# Altium PCB 0_10V.PcbDoc
Units mm, origin at the board's own origin, x right, y up, seen from the top; angles counter-clockwise.
Board outline 47.5 x 45 mm, 2 copper layers (Top Layer, Bottom Layer); 49 components, 38 nets, 172 pads, 67 vias.
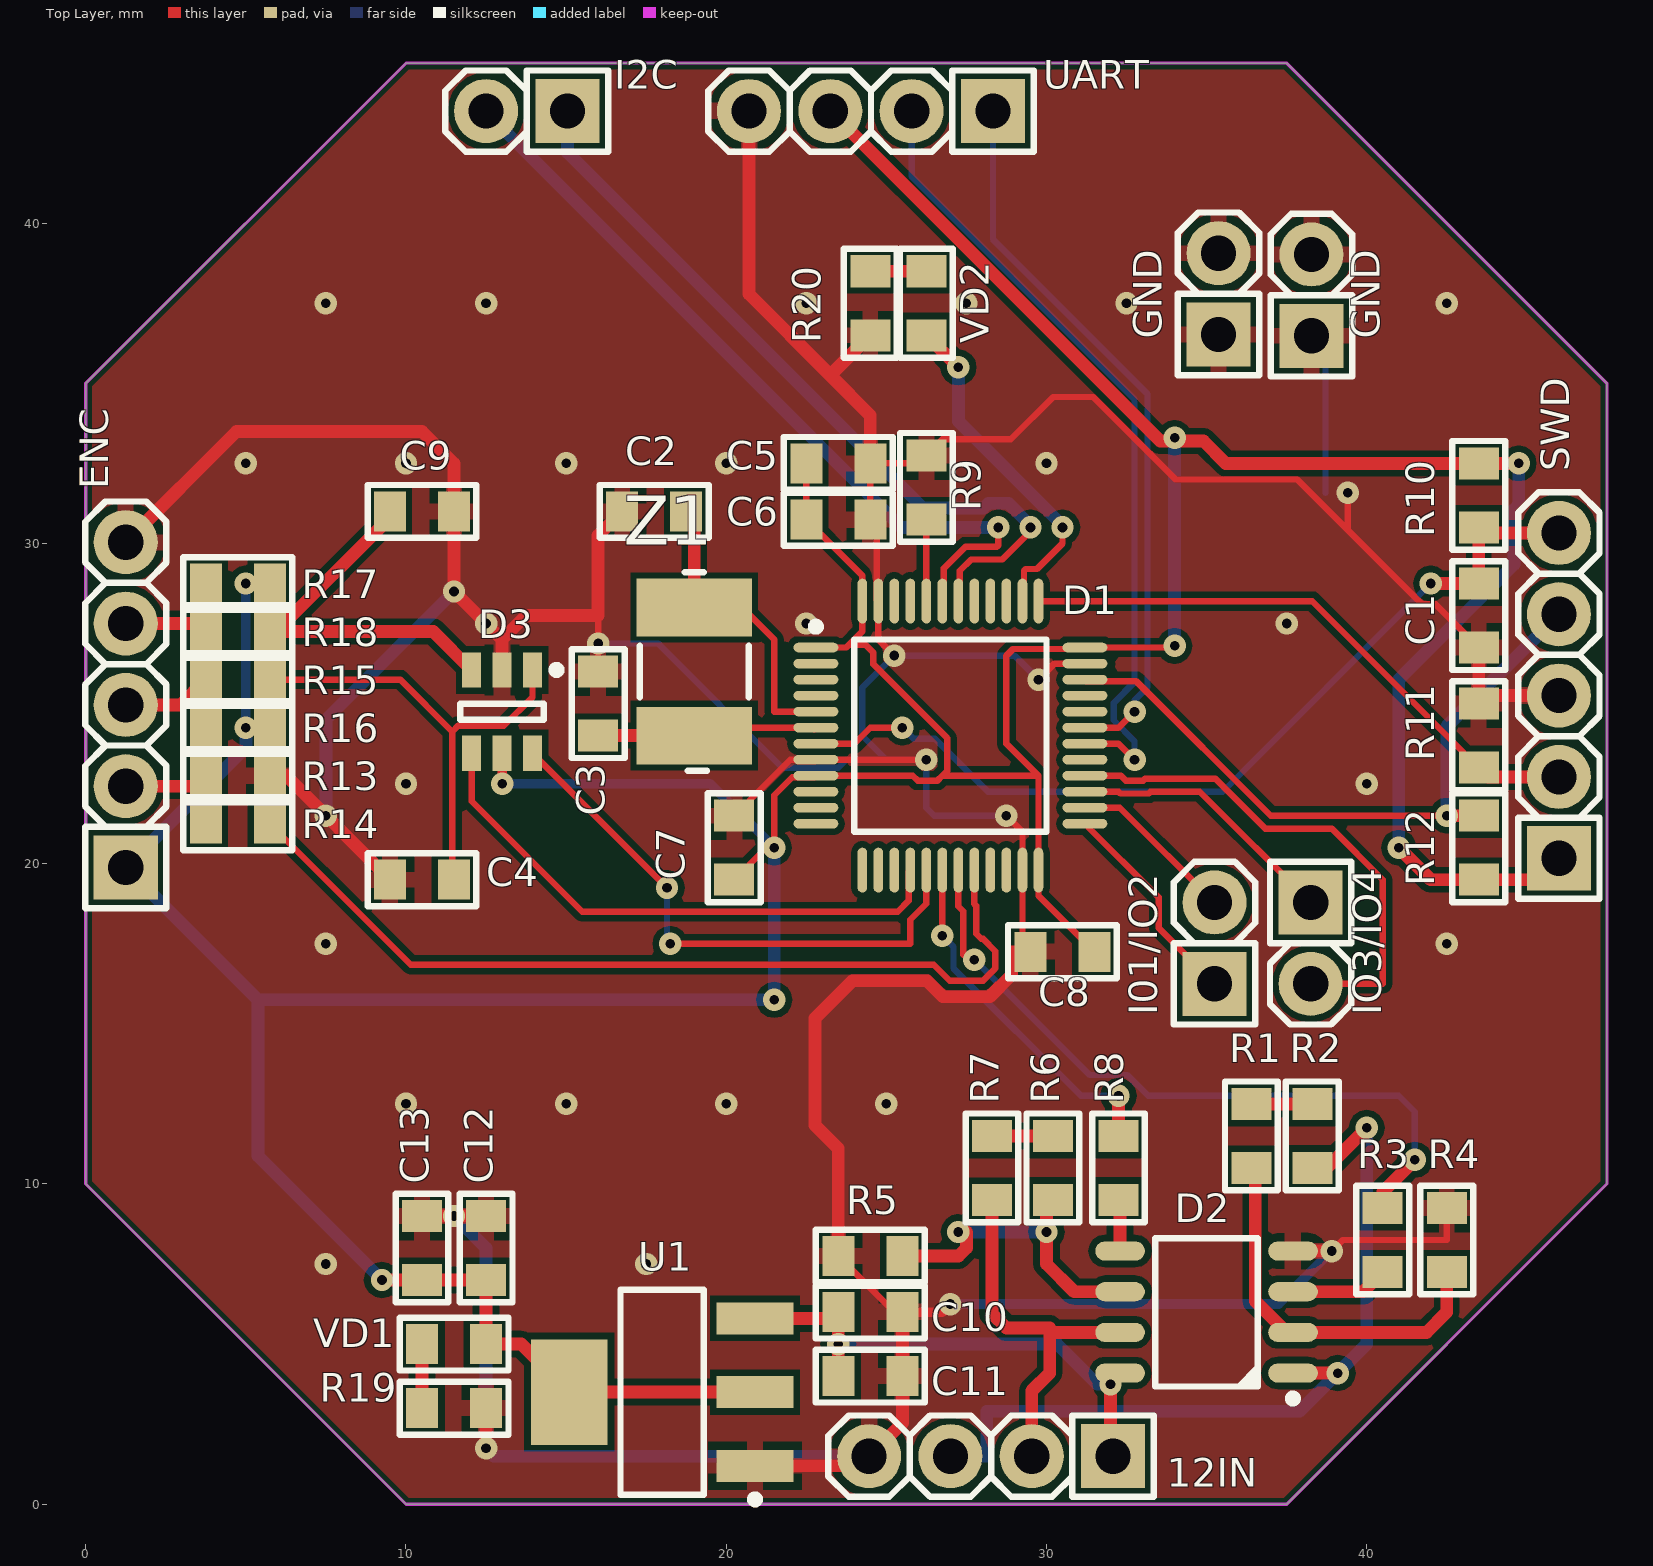
[diagram p0: Top Layer view]
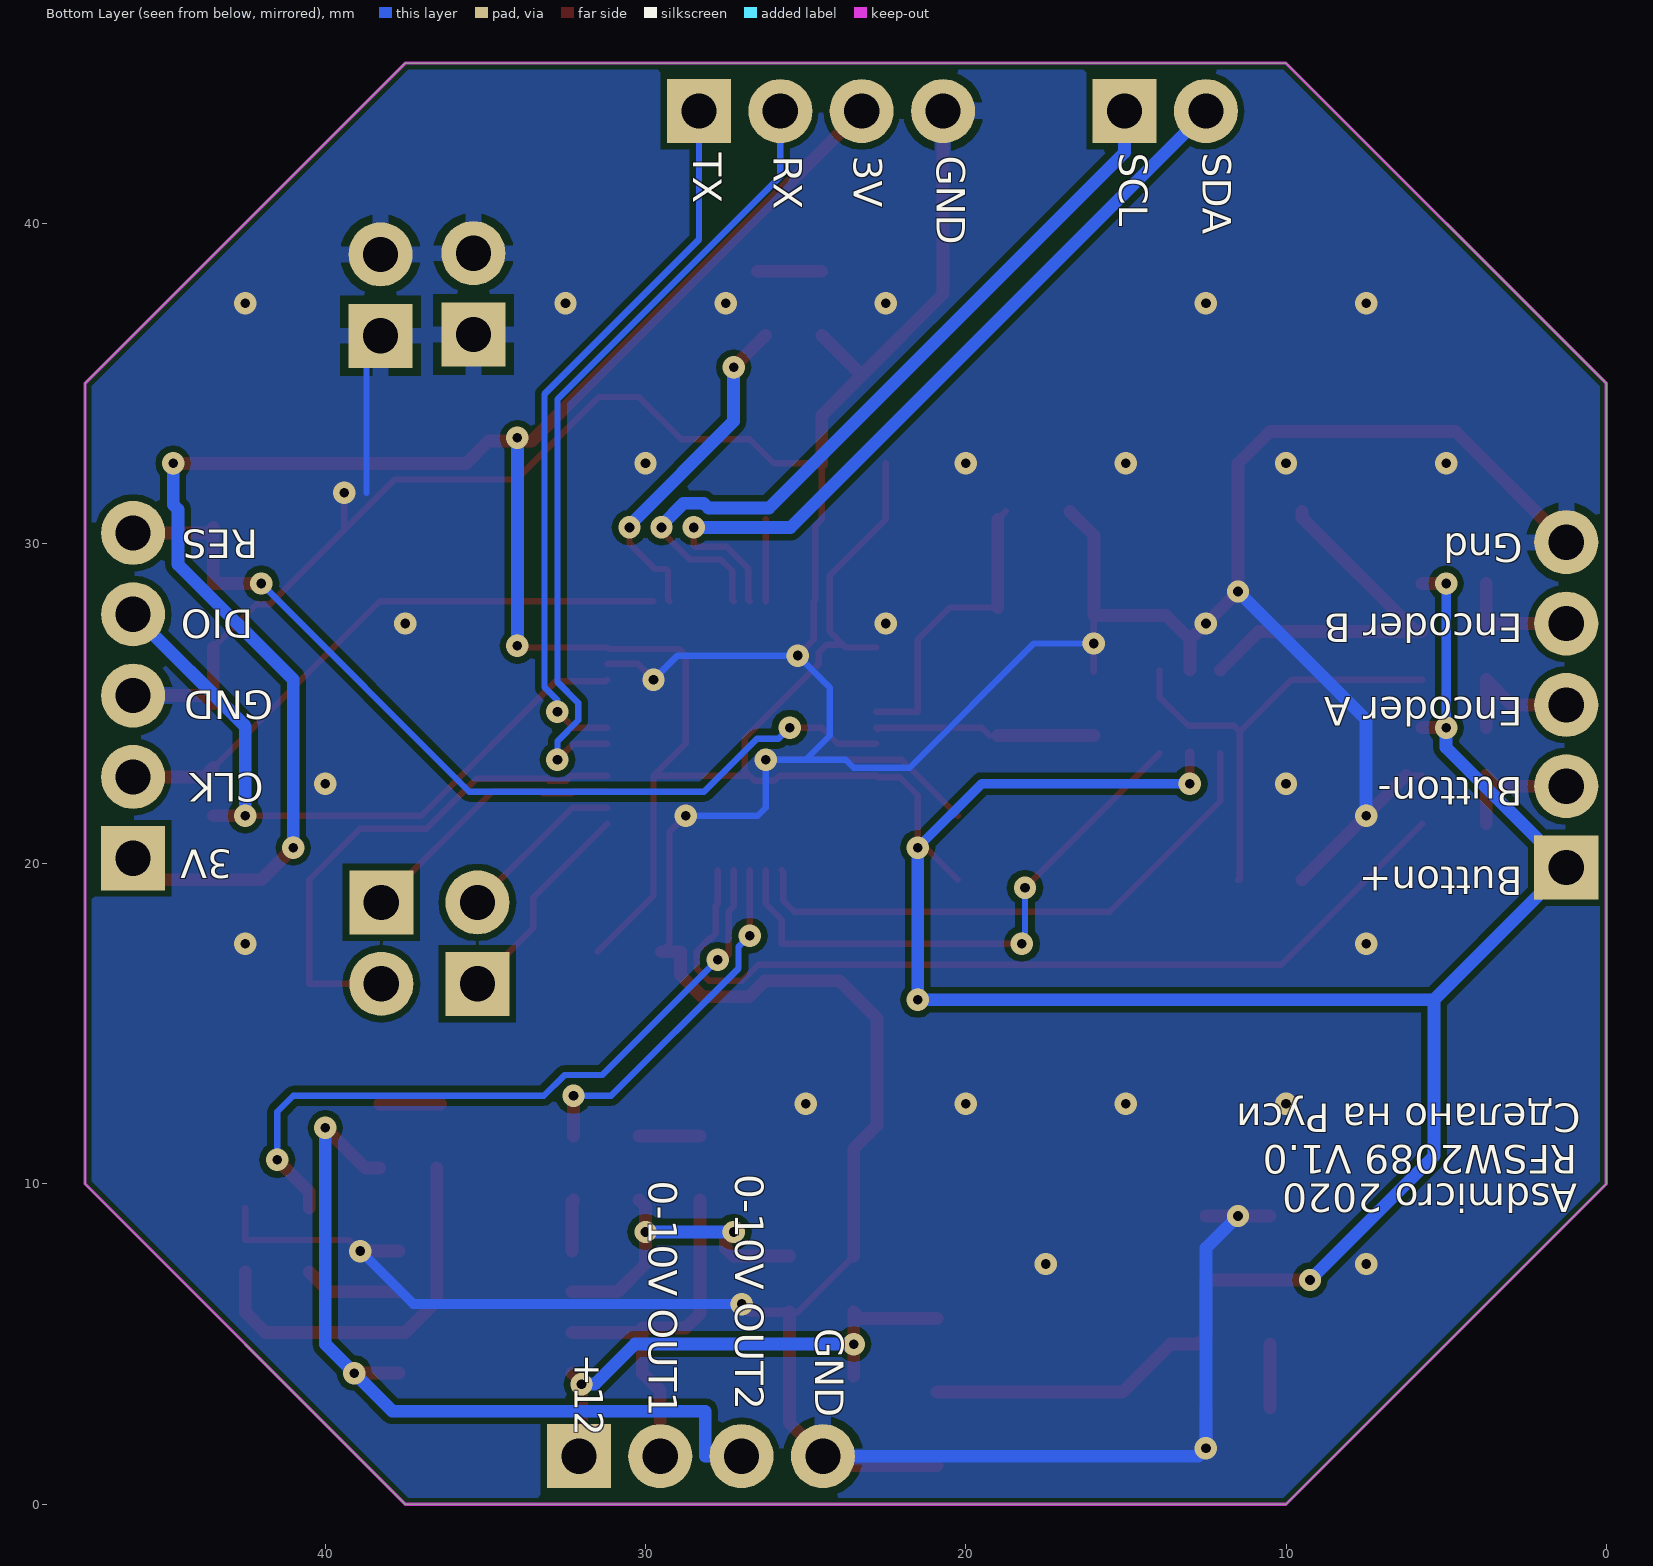
[diagram p1: Bottom Layer view, seen from below]
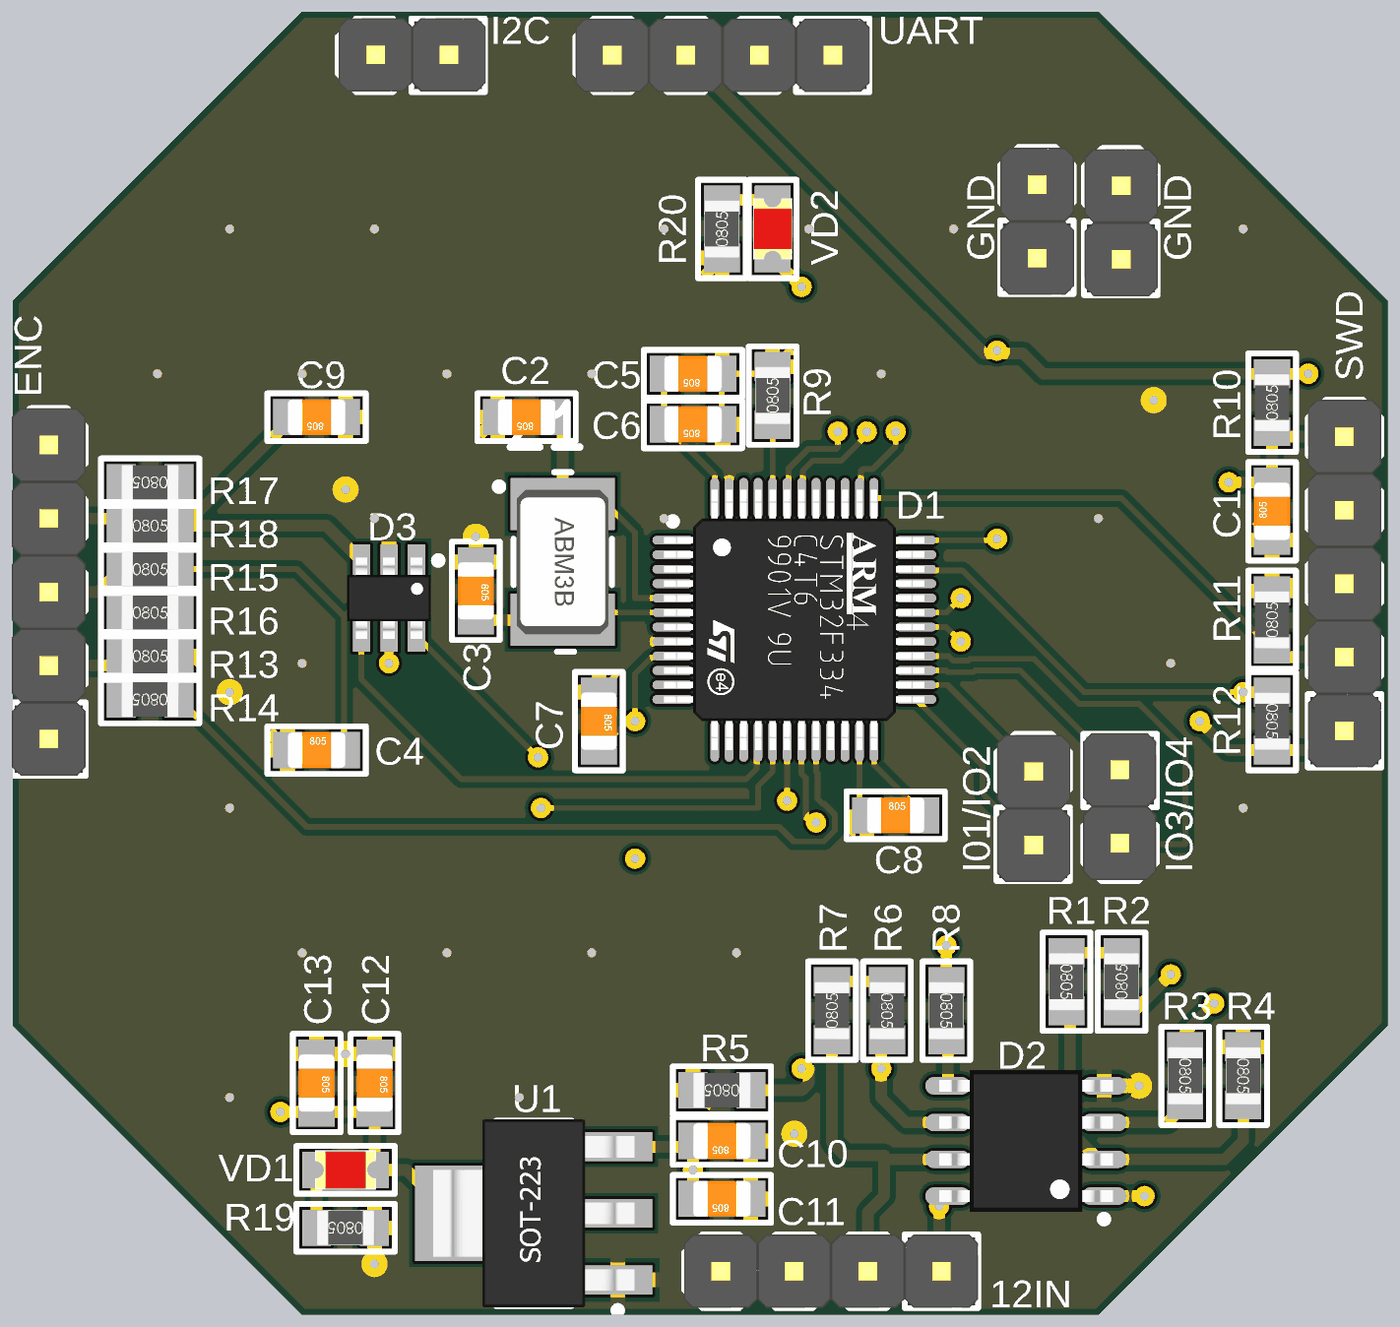
[diagram p2: 3D render of the assembled board from above, using the file's embedded part models]

## Layer stack, top to bottom
Top Solder: solder mask 0.0102, Solder Resist, Dk 3.5
Top Layer: signal copper 0.0356
Dielectric 1: dielectric 0.32, FR-4, Dk 4.8
Bottom Layer: signal copper 0.0356
Bottom Solder: solder mask 0.0102, Solder Resist, Dk 3.5

## Board outline
0,10 0,35 10,45 37.5,45 47.5,35 47.5,10 37.5,0 10,0

## Design rules (kind name [scope] priority, off if disabled: settings)
BoardOutlineClearance [All] p1: gap=0.2 ignorepadtopadclearanceinfootprint=FALSE except(0.4: Arc-SplitBarrior Arc-SplitContinuation Track-SplitBarrior Track-SplitContinuation SMDPad-SplitBarrior SMDPad-SplitContinuation THPad-SplitBarrior THPad-SplitContinuation Via-SplitBarrior Via-SplitContinuation Fill-SplitBarrior Fill-SplitContinuation Poly-SplitBarrior Poly-SplitContinuation Region-SplitBarrior Region-SplitContinuation Text-SplitBarrior Text-SplitContinuation)
Clearance "Clearance Bottom Layer" [OnLayer('Bottom Layer')] p1: gap=0.203 ignorepadtopadclearanceinfootprint=TRUE except(0.254: Arc-Text Track-Text SMDPad-Text THPad-Text Via-Text Fill-Text Poly-Text Region-Text Text-Text)
Clearance "Clearance Top Layer" [OnLayer('Top Layer')] p2: gap=0.203 ignorepadtopadclearanceinfootprint=TRUE except(0.254: Arc-Text Track-Text SMDPad-Text THPad-Text Via-Text Fill-Text Poly-Text Region-Text Text-Text)
Clearance [All] p3: gap=0.2 ignorepadtopadclearanceinfootprint=FALSE except(0.089: Arc-Arc Arc-Track Arc-SMDPad Track-Track Track-SMDPad SMDPad-SMDPad; 0.127: Arc-Via Track-Via SMDPad-Via THPad-Via Via-Via; 0.254: Arc-Text Track-Text SMDPad-Text THPad-Text Via-Text Fill-Text Poly-Text Region-Text Text-Text)
HoleSize [All] p1: absolutevalues=TRUE maxlimit=6.3 minlimit=0.2 maxpercent=80.000 minpercent=20.000
MinimumAnnularRing [All] p1: minimumring=0.076
MinimumSolderMaskSliver [All] p1: minsoldermaskwidth=0.1
PolygonConnect PolygonConnect_1 [All] p1: thpad.connectstyle=Relief thpad.reliefconductorwidth=0.508 thpad.reliefentries=4 thpad.polygonreliefangle="90 Angle" thpad.airgapwidth=0.254 smdpad.connectstyle=Relief smdpad.reliefconductorwidth=0.508 smdpad.reliefentries=4 smdpad.polygonreliefangle="90 Angle" smdpad.airgapwidth=0.254 via.connectstyle=Direct via.reliefconductorwidth=0.508 via.reliefentries=4 via.polygonreliefangle="90 Angle" via.airgapwidth=0.254
RoutingCorners [All] p1: cornerstyle=Round minsetback=2.54 maxsetback=2.54
RoutingVias [All] p1: holewidth=0.5 width=1 viastyle="Through Hole" minholewidth=0.2 minwidth=0.45 maxholewidth=1 maxwidth=2
SilkToSilkClearance [All] p1: silktosilkclearance=0.1
SilkToSolderMaskClearance [IsPad] p1: minsilkscreentomaskgap=0.1 clearancetoexposedcopper=TRUE
SolderMaskExpansion [All] p1: expansion=0.102
Width [All] p1: maxlimit=2.54 minlimit=0.089 preferedwidth=0.381
25 further rules are at their usual default settings.

## Components (designator, comment, footprint, x,y, rotation, side; value= is the part's Value field where it differs from the comment)
12IN "Connector, 4pin, 2.54mm, 500VAC, 3A" "CON: PLS-4" 28.27,1.5 r180 top
C1 "Ceramic capacitor, 100nF, X7R, ±10%, Voltage, 0805, -55...+125°C" "CAP: 0805" 43.5,27.75 r90 top value=100nF
C2 "Ceramic capacitor, 20pF, X7R, ±10%, Voltage, 0805, -55...+125°C" "CAP: 0805" 17.75,31 r180 top value=20pF
C3 "Ceramic capacitor, 20pF, X7R, ±10%, Voltage, 0805, -55...+125°C" "CAP: 0805" 16,25 r270 top value=20pF
C4 "Ceramic capacitor, 100nF, X7R, ±10%, Voltage, 0805, -55...+125°C" "CAP: 0805" 10.5,19.5 r0 top value=100nF
C5 "Ceramic capacitor, 100nF, X7R, ±10%, Voltage, 0805, -55...+125°C" "CAP: 0805" 23.5,32.5 r180 top value=100nF
C6 "Ceramic capacitor, 100nF, X7R, ±10%, Voltage, 0805, -55...+125°C" "CAP: 0805" 23.5,30.75 r180 top value=100nF
C7 "Ceramic capacitor, 100nF, X7R, ±10%, Voltage, 0805, -55...+125°C" "CAP: 0805" 20.25,20.5 r270 top value=100nF
C8 "Ceramic capacitor, 100nF, X7R, ±10%, Voltage, 0805, -55...+125°C" "CAP: 0805" 30.5,17.25 r0 top value=100nF
C9 "Ceramic capacitor, 100nF, X7R, ±10%, Voltage, 0805, -55...+125°C" "CAP: 0805" 10.5,31 r180 top value=100nF
C10 "Ceramic capacitor, 10uF, X7R, ±10%, Voltage, 0805, -55...+125°C" "CAP: 0805" 24.5,6 r180 top value=10uF
C11 "Ceramic capacitor, 100uF, X7R, ±10%, Voltage, 0805, -55...+125°C" "CAP: 0805" 24.5,4 r180 top value=100uF
C12 "Ceramic capacitor, 10uF, X7R, ±10%, Voltage, 0805, -55...+125°C" "CAP: 0805" 12.5,8 r270 top value=10uF
C13 "Ceramic capacitor, 100nF, X7R, ±10%, Voltage, 0805, -55...+125°C" "CAP: 0805" 10.5,8 r270 top value=100nF
D1 "IC microcontroller, 32-Bit, Cortex-M3, 72MHz, 64KB, 20KB, 2...3.6V, -40...+85°C, 48-LQFP" 48-LQFP 27,24 r0 top
D2 "IC op amplifier, Rail-to-Rail, 3 MHz, 2.7...5.5V, -40...+125°C, SOT23-5" 8-SOIC 35,6 r180 top
D3 "IC op amplifier, Rail-to-Rail, 3 MHz, 2.7...5.5V, -40...+125°C, SOT23-6" SOT23-6 13,24.75 r270 top
ENC "Connector, 5pin, 2.54mm, 500VAC, 3A" "CON: PLS-5" 1.25,24.96 r90 top
GND "Connector, 2pin, 2.54mm, 500VAC, 3A" "CON: PLS-2" 38.275,37.755 r90 top
GND "Connector, 2pin, 2.54mm, 500VAC, 3A" "CON: PLS-2" 35.375,37.795 r90 top
I01/IO2 "Connector, 2pin, 2.54mm, 500VAC, 3A" "CON: PLS-2" 35.25,17.52 r90 top
I2C "Connector, 2pin, 2.54mm, 500VAC, 3A" "CON: PLS-2" 13.77,43.5 r180 top
IO3/IO4 "Connector, 2pin, 2.54mm, 500VAC, 3A" "CON: PLS-2" 38.25,17.52 r270 top
R1 "Resistor film, 10K, Tolerance, 0805, 0.125W, -55...+125°C" "RES: 0805" 36.4,11.5 r270 top value=10K
R2 "Resistor film, 10K, Tolerance, 0805, 0.125W, -55...+125°C" "RES: 0805" 38.3,11.5 r90 top value=10K
R3 "Resistor film, 10K, Tolerance, 0805, 0.125W, -55...+125°C" "RES: 0805" 40.5,8.25 r270 top value=10K
R4 "Resistor film, 10K, Tolerance, 0805, 0.125W, -55...+125°C" "RES: 0805" 42.5,8.25 r270 top value=10K
R5 "Resistor film, 10K, Tolerance, 0805, 0.125W, -55...+125°C" "RES: 0805" 24.5,7.75 r180 top value=10K
R6 "Resistor film, 10K, Tolerance, 0805, 0.125W, -55...+125°C" "RES: 0805" 30.2,10.5 r270 top value=10K
R7 "Resistor film, 10K, Tolerance, 0805, 0.125W, -55...+125°C" "RES: 0805" 28.3,10.5 r90 top value=10K
R8 "Resistor film, 10K, Tolerance, 0805, 0.125W, -55...+125°C" "RES: 0805" 32.25,10.5 r270 top value=10K
R9 "Resistor film, Value, 47K, 0805, 0.125W, -55...+125°C" "RES: 0805" 26.25,31.75 r90 top
R10 "Resistor film, 47K, Tolerance, 0805, 0.125W, -55...+125°C" "RES: 0805" 43.5,31.5 r90 top value=47K
R11 "Resistor film, 1K, Tolerance, 0805, 0.125W, -55...+125°C" "RES: 0805" 43.5,24 r90 top value=1K
R12 "Resistor film, 1K, Tolerance, 0805, 0.125W, -55...+125°C" "RES: 0805" 43.5,20.5 r270 top value=1K
R13 "Resistor film, 4.7K, Tolerance, 0805, 0.125W, -55...+125°C" "RES: 0805" 4.75,22.75 r0 top value=4.7K
R14 "Resistor film, 4.7K, Tolerance, 0805, 0.125W, -55...+125°C" "RES: 0805" 4.75,21.25 r180 top value=4.7K
R15 "Resistor film, 4.7K, Tolerance, 0805, 0.125W, -55...+125°C" "RES: 0805" 4.75,25.75 r0 top value=4.7K
R16 "Resistor film, 4.7K, Tolerance, 0805, 0.125W, -55...+125°C" "RES: 0805" 4.75,24.25 r0 top value=4.7K
R17 "Resistor film, 4.7K, Tolerance, 0805, 0.125W, -55...+125°C" "RES: 0805" 4.75,28.75 r180 top value=4.7K
R18 "Resistor film, 4.7K, Tolerance, 0805, 0.125W, -55...+125°C" "RES: 0805" 4.75,27.25 r0 top value=4.7K
R19 "Resistor film, Value, 1K, 0805, 0.125W, -55...+125°C" "RES: 0805" 11.5,3 r180 top
R20 "Resistor film, Value, 1K, 0805, 0.125W, -55...+125°C" "RES: 0805" 24.5,37.5 r90 top
SWD "Connector, 5pin, 2.54mm, 500VAC, 3A" "CON: PLS-5" 46,25.25 r90 top
U1 "Linear voltage regulator, input17V, 0.25V, output 3.3V, 700mA, -40...+85°C, SOT-23-5" SOT223 18,3.5 r180 top
UART "Connector, 4pin, 2.54mm, 500VAC, 3A" "CON: PLS-4" 24.52,43.5 r180 top
VD1 "LED, Green, *, *, *, -55...+150°C" "LED: 0805R" 11.5,5 r180 top
VD2 "LED, Green, *, *, *, -55...+150°C" "LED: 0805R" 26.25,37.5 r90 top
Z1 "Crystal, Frequency, 12.5pF, ±20ppm, case 3215, -40...+85°C" "OSC: 5032-2" 19,26 r270 top

## Footprints (in the part's own frame and the unit in brackets; to place one, negate y for a bottom-side part, rotate by r counter-clockwise, add the part's x,y. Pads: shape width x height; smd on the part's side, far side on the other; paste and mask are expansions set on the pad)
8-SOIC [mm] "pitch 1.27 mm"
  rrect100% 1.55x0.6 smd: 1(-2.7,1.905) 2(-2.7,0.635) 3(-2.7,-0.635) 4(-2.7,-1.905) 5(2.7,-1.905) 6(2.7,-0.635) 7(2.7,0.635) 8(2.7,1.905)
  round 0.7 on Mech1: 28(-2.395,1.8)
  silkscreen extent -2.82,-2.3 1.61,2.82, body extent -3,-2.45 3,2.45, height 1.75
48-LQFP [mm] "QFP, 48-Leads, Body 7x7mm, Pitch 0.5mm, IPC Medium Density"
  oval 1.4x0.3 smd: 1(-4.2,2.75) 2(-4.2,2.25) 3(-4.2,1.75) 4(-4.2,1.25) 5(-4.2,0.75) 6(-4.2,0.25) 7(-4.2,-0.25) 8(-4.2,-0.75) 9(-4.2,-1.25) 10(-4.2,-1.75) 11(-4.2,-2.25) 12(-4.2,-2.75) 25(4.2,-2.75) 26(4.2,-2.25) 27(4.2,-1.75) 28(4.2,-1.25) 29(4.2,-0.75) 30(4.2,-0.25) 31(4.2,0.25) 32(4.2,0.75) 33(4.2,1.25) 34(4.2,1.75) 35(4.2,2.25) 36(4.2,2.75)
  oval 0.3x1.4 smd: 13(-2.75,-4.2) 14(-2.25,-4.2) 15(-1.75,-4.2) 16(-1.25,-4.2) 17(-0.75,-4.2) 18(-0.25,-4.2) 19(0.25,-4.2) 20(0.75,-4.2) 21(1.25,-4.2) 22(1.75,-4.2) 23(2.25,-4.2) 24(2.75,-4.2) 37(2.75,4.2) 38(2.25,4.2) 39(1.75,4.2) 40(1.25,4.2) 41(0.75,4.2) 42(0.25,4.2) 43(-0.25,4.2) 44(-0.75,4.2) 45(-1.25,4.2) 46(-1.75,4.2) 47(-2.25,4.2) 48(-2.75,4.2)
  round 0.5 on Mech1: ""(-4,4)
  silkscreen extent -4.32,-3 3,3.52, body extent -4.5,-4.5 4.5,4.5, height 1.6
"CAP: 0805" [mm]
  rect 1x1.25 smd: 1(-1,0) 2(1,0)
  silkscreen extent -1.7,-0.82 1.7,0.82, body extent -1,-0.62 1,0.63, height 0.78
"CON: PLS-2" [mm]
  rect 2x2 hole 1.1: 1(-1.27,0)
  round 2 hole 1.1: 2(1.27,0)
  silkscreen extent -2.54,-1.27 2.54,1.27, body extent -2.57,-1.28 2.51,1.26, height 8.54
"CON: PLS-4" [mm] "PLS-40 4 pin header"
  rect 2x2 hole 1.1: 1(-3.81,0)
  round 2 hole 1.1: 2(-1.27,0) 3(1.27,0) 4(3.81,0)
  silkscreen extent -5.08,-1.27 5.08,1.27, body extent -5.08,-1.27 5.08,1.27, height 8.54
"CON: PLS-5" [mm]
  rect 2x2 hole 1.1: 1(-5.08,0)
  round 2 hole 1.1: 2(-2.54,0) 3(0,0) 4(2.54,0) 5(5.08,0)
  silkscreen extent -6.35,-1.27 6.35,1.27, body extent -6.35,-1.27 6.35,1.27, height 8.54
"LED: 0805R" [mm]
  rect 1x1.25 smd: 1(-1,0) 2(1,0)
  silkscreen extent -1.7,-0.82 1.7,0.82, body extent -1.05,-0.67 1.05,0.68, height 0.9
"OSC: 5032-2" [mm]
  rect 1.8x3.6 smd: 1(-2,0) 2(2,0)
  round 0.5 on Top Overlay: ""(-2.6,-2.2)
  round 0.5 on Mech1: ""(-2,-1.1)
  silkscreen extent -3.1,-1.7 3.1,1.7, body extent -2.5,-1.59 2.5,1.59, height 1.1
"RES: 0805" [mm]
  rect 1x1.25 smd: 1(-1,0) 2(1,0)
  silkscreen extent -1.7,-0.82 1.7,0.82, body extent -1,-0.6 1,0.6, height 0.44
SOT23-6 [mm] "pitch 0.95 mm"
  rect 1.1x0.6 smd: 1(-1.3,0.95) 2(-1.3,0) 3(-1.3,-0.95) 4(1.3,-0.95) 5(1.3,0) 6(1.3,0.95)
  round 0.5 on Mech1: ""(-1,1.1)
  silkscreen extent -1.42,-1.3 0.25,1.83, body extent -1.4,-1.45 1.4,1.45, height 1.45
SOT223 [mm] "SOT223, 4-Leads, Body 6,50x7,00mm (avg), Pitch 2,30mm, IPC Medium Density"
  rect 2.4x1 smd: 1(-2.9,2.3) 2(-2.9,0) 3(-2.9,-2.3)
  rect 2.4x3.3 smd: 2(2.9,0)
  round 0.5 on Mech1: ""(-3,2.7)
  silkscreen extent -3.03,-3.2 1.3,3.47, body extent -3.48,-3.25 3.48,3.25, height 1.65

## Part data
12IN UART: library part PLS-4, CurrentMax=3A, Manufacturer=Connfly, VoltageMax=500VAC, CommentText="\"Разъем\"", HelpURL=https://www.chipdip.ru/product/pls-4, Multichannel=4pin, PartNumber=PLS-4, Pitch=2.54mm, TypeConnector=Connector, ValueManufacturerPartNumber="Connector, 4pin, 2.54mm, 500VAC, 3A"
C1: library part Ceramic_0805, Manufacturer=Yageo, Package=0805, PartNumber=C49678, Temperature=-55...+125°C, Tolerance=±10%, TypeCapacitor="Ceramic capacitor", TypeDielectric=X7R, HelpURL=https://www.digikey.com/product-detail/en/yageo/CC0805KRX7R7BB104/311-1142-1-ND/303052, ValueManufacturerPartNumber="Ceramic capacitor, 100nF, X7R, ±10%, Voltage, 0805, -55...+125°C"
C2 C3 C4 C5 C6 C7 C8 C9 C10 C11 C12 C13: library part Ceramic_0805, Manufacturer=Yageo, Package=0805, PartNumber=CC0805KRX7R7BB104, Temperature=-55...+125°C, Tolerance=±10%, TypeCapacitor="Ceramic capacitor", TypeDielectric=X7R, HelpURL=https://www.digikey.com/product-detail/en/yageo/CC0805KRX7R7BB104/311-1142-1-ND/303052
  C2 C3: ValueManufacturerPartNumber="Ceramic capacitor, 20pF, X7R, ±10%, Voltage, 0805, -55...+125°C"
  C4 C5 C6 C7 C8 C9 C13: ValueManufacturerPartNumber="Ceramic capacitor, 100nF, X7R, ±10%, Voltage, 0805, -55...+125°C"
  C10 C12: ValueManufacturerPartNumber="Ceramic capacitor, 10uF, X7R, ±10%, Voltage, 0805, -55...+125°C"
  C11: ValueManufacturerPartNumber="Ceramic capacitor, 100uF, X7R, ±10%, Voltage, 0805, -55...+125°C"
D1: library part STM32F103C8T6, "Cortex-M3", LCSC=C23922, Manufacturer=STMicroelectronics, Package=48-LQFP, PartNumber=STM32F030C8T6, Temperature=-40...+85°C, ComponentType="IC microcontroller", CoreProcessor=Cortex-M3, CoreSize=32-Bit, HelpURL=https://www.digikey.com/product-detail/en/stmicroelectronics/STM32F103C8T6TR/497-17666-1-ND/7804402, MemoryRAM=20KB, MemoryROM=64KB, Speed=72MHz, Supply=2...3.6V, ValueManufacturerPartNumber="IC microcontroller, 32-Bit, Cortex-M3, 72MHz, 64KB, 20KB, 2...3.6V, -40...+85°C, 48-LQFP"
D2: library part LM358_, "OP amplifier", Manufacturer="Texas Instruments", Package=SOT23-5, PartNumber=OPA2337EA/3K, Temperature=-40...+125°C, ComponentType="IC op amplifier", GainBandwidth="3 MHz", HelpURL=https://www.digikey.com/product-detail/en/texas-instruments/OPA2337EA-3K/296-26252-1-ND/2254915, OutputType=Rail-to-Rail, Supply=2.7...5.5V, ValueManufacturerPartNumber="IC op amplifier, Rail-to-Rail, 3 MHz, 2.7...5.5V, -40...+125°C, SOT23-5"
D3: library part SN74LVC2G17DBVR, "BUFFERS, DRIVERS, RECEIVERS,", LCSC=C10429, Manufacturer="Texas Instruments", Package=SOT23-6, Temperature=-40...+125°C, ComponentType="IC op amplifier", GainBandwidth="3 MHz", HelpURL=https://www.digikey.com/product-detail/en/texas-instruments/OPA2337EA-3K/296-26252-1-ND/2254915, OutputType=Rail-to-Rail, PartNumber=SN74LVC2G17DBVR, Supply=2.7...5.5V, ValueManufacturerPartNumber="IC op amplifier, Rail-to-Rail, 3 MHz, 2.7...5.5V, -40...+125°C, SOT23-6"
ENC SWD: library part PLS-5, CurrentMax=3A, Manufacturer=Connfly, VoltageMax=500VAC, HelpURL=https://www.chipdip.ru/product/pls-5, Multichannel=5pin, PartNumber=PLS-5, Pitch=2.54mm, TypeConnector=Connector, ValueManufacturerPartNumber="Connector, 5pin, 2.54mm, 500VAC, 3A"
  ENC: CommentText="\"Разъем\""
  SWD: CommentText="\"SWD\""
GND GND I01/IO2 I2C IO3/IO4: library part PLS-2, CurrentMax=3A, Manufacturer=Connfly, VoltageMax=500VAC, HelpURL=https://www.chipdip.ru/product/pls-2, Multichannel=2pin, PartNumber=PLS-2, Pitch=2.54mm, TypeConnector=Connector, ValueManufacturerPartNumber="Connector, 2pin, 2.54mm, 500VAC, 3A"
  I2C: CommentText=I2C
R1 R2 R4 R5 R6 R7 R8 R13 R14 R15 R16 R17 R18: library part Resistor_0805, Manufacturer=Yageo, Package=0805, PartNumber=RC0805JR-07100RL, Power=0.125W, Temperature=-55...+125°C, TypeResistor="Resistor film", HelpURL=https://www.digikey.com/product-detail/en/yageo/RC0805JR-07100RL/311-100ARCT-ND/731185
  R1 R2 R4 R5 R6 R7 R8: ValueManufacturerPartNumber="Resistor film, 10K, Tolerance, 0805, 0.125W, -55...+125°C"
  R13 R14 R15 R16 R17 R18: ValueManufacturerPartNumber="Resistor film, 4.7K, Tolerance, 0805, 0.125W, -55...+125°C"
R3: library part Resistor_0805, LCSC=C17414, Manufacturer=Yageo, Package=0805, PartNumber=RC0805JR-07100RL, Power=0.125W, Temperature=-55...+125°C, TypeResistor="Resistor film", HelpURL=https://www.digikey.com/product-detail/en/yageo/RC0805JR-07100RL/311-100ARCT-ND/731185, ValueManufacturerPartNumber="Resistor film, 10K, Tolerance, 0805, 0.125W, -55...+125°C"
R9: library part Resistor_0805, Manufacturer=Yageo, Package=0805, PartNumber=RC0805JR-07100RL, Power=0.125W, Temperature=-55...+125°C, Tolerance=47K, TypeResistor="Resistor film", HelpURL=https://www.digikey.com/product-detail/en/yageo/RC0805JR-07100RL/311-100ARCT-ND/731185, ValueManufacturerPartNumber="Resistor film, Value, 47K, 0805, 0.125W, -55...+125°C"
R10: library part Resistor_0805, Manufacturer=Yageo, Package=0805, PartNumber=C17713, Power=0.125W, Temperature=-55...+125°C, TypeResistor="Resistor film", HelpURL=https://www.digikey.com/product-detail/en/yageo/RC0805JR-07100RL/311-100ARCT-ND/731185, ValueManufacturerPartNumber="Resistor film, 47K, Tolerance, 0805, 0.125W, -55...+125°C"
R11 R12: library part Resistor_0805, Manufacturer=Yageo, Package=0805, PartNumber=C17513, Power=0.125W, Temperature=-55...+125°C, TypeResistor="Resistor film", HelpURL=https://www.digikey.com/product-detail/en/yageo/RC0805JR-07100RL/311-100ARCT-ND/731185, ValueManufacturerPartNumber="Resistor film, 1K, Tolerance, 0805, 0.125W, -55...+125°C"
R19 R20: library part Resistor_0805, Manufacturer=Yageo, Package=0805, PartNumber=RC0805JR-07100RL, Power=0.125W, Temperature=-55...+125°C, Tolerance=1K, TypeResistor="Resistor film", HelpURL=https://www.digikey.com/product-detail/en/yageo/RC0805JR-07100RL/311-100ARCT-ND/731185, ValueManufacturerPartNumber="Resistor film, Value, 1K, 0805, 0.125W, -55...+125°C"
U1: library part AMS1117-3.3, "Linear voltage regulator", CurrentOutput=700mA, LCSC=C6186, Manufacturer="Texas Instruments", Package=SOT-23-5, Temperature=-40...+85°C, VoltageInput=input17V, VoltageOutput="output 3.3V", ComponentType="Linear voltage regulator", MaxDropout=0.25V, ValueManufacturerPartNumber="Linear voltage regulator, input17V, 0.25V, output 3.3V, 700mA, -40...+85°C, SOT-23-5"
VD1 VD2: library part LED_single, ColorParameter=Green, Temperature=-55...+150°C, TypeDiode=LED, ValueManufacturerPartNumber="LED, Green, *, *, *, -55...+150°C"
Z1: library part Crystal_3215, LoadCapacitance=12.5pF, Manufacturer=Epson, Package="case 3215", PartNumber="FC-135 32.7680KA-A5", Temperature=-40...+85°C, Tolerance=±20ppm, HelpURL=https://www.digikey.com/product-detail/en/epson/FC-135-32.7680KA-A5/SER4103CT-ND/6188447, TypeOscilator=Crystal, ValueManufacturerPartNumber="Crystal, Frequency, 12.5pF, ±20ppm, case 3215, -40...+85°C"

## Via types
v1: diameter 0.7, hole 0.3, Top Layer to Bottom Layer, 43 vias
v2: diameter 0.7, hole 0.3, Top Layer to Bottom Layer, tented both sides, 24 vias

## Nets (pads, with @x,y where several pads share a name; then routed paths per layer and width w, separated by ;. In a path a pad name is that pad's centre, name@x,y a point inside that pad or via, vN(x,y) a via of type N, cw(c..) or ccw(c..) an arc to the next point about the centre after c; other vN are vias at no path point)
3V: C5.2 C6.2 C7.2 C8.2 C12.2 C13.2 D1.1 D1.9 D1.24 D1.36 D1.48 D3.5 ENC.1 R10.2 R12.2 R16.2 R17.1 SWD.1 U1.2 UART.3 VD1.1 | length 166.4
  Top Layer w0.2: C7.2 21.5,20.75 21.5,22.141 22.062,22.703 22.753,22.703 D1.9 25.826,22.75 25.979,22.597 26.597,22.597 26.75,22.75 ; C5.2 C6.2 24.25,29 D1.48 24.25,27.25 23.833,26.833 ; D1.1 23.75,26.75 23.833,26.833 ; C8.2 29.75,19 D1.24 29.75,22.75 ; v1(34,26.8) 33.95,26.75 D1.36 31.153,26.703 28.953,26.703 28.75,26.5 28.75,23.75 29.75,22.75 ; 23.833,26.833 24.347,26.833 24.597,26.583 24.597,26.229 26.903,23.923 26.903,22.903 26.75,22.75 ; 26.75,22.75 29.75,22.75
  Top Layer w0.3: v1(13,22.5) D3.5
  Top Layer w0.4: v1(5,24.25) R16.2 ; v1(5,28.75) R17.1 ; v1(9.25,7) C13.2 C12.2 12.5,5.25 12.75,5 13.6,5 15.1,3.5 U1.2@20.9,3.5 ; UART.3 33.55,33.2 34.9,33.2 35.6,32.5 R10.2 v1(44.75,32.5) ; v1(41,20.5) 42,19.5 R12.2 45.33,19.5 SWD.1 SWD.1@46.25,19.92
  Bottom Layer w0.3: v1(5,24.25) v1(5,28.75) ; v1(13,22.5) 19.5,22.5 v1(21.5,20.5)
  Bottom Layer w0.4: v1(5,24.25) 5,23.63 ENC.1 5.38,15.75 ; v1(9.25,7) 5.38,10.87 5.38,15.75 ; v1(21.5,20.5) v1(21.5,15.75) 5.38,15.75 ; v1(34,26.8) v1(34,33.3) ; v1(41,20.5) 41,25.75 44.597,29.347 44.597,31.064 44.75,31.218 v1(44.75,32.5)
12V: 12IN.1 C10.2 C11.2 D2.8 U1.3 | length 16.5
  Top Layer w0.4: U1.3 23.3,5.8 C10.2 v1(23.5,5) C11.2 ; 12IN.1 32,1.58 v1(32,3.75) 32,3.795 D2.8
  Bottom Layer w0.4: v1(23.5,5) 30.33,5 31.58,3.75 v1(32,3.75)
GND: 12IN.4 C1.1 C2.2 C3.1 C4.1 C5.1 C6.1 C7.1 C8.1 C9.1 C10.1 C11.1 C12.1 C13.1 D1.8 D1.23 D1.35 D1.47 D2.4 D3.2 ENC.5 GND.1 GND.2 R4.1 R5.2 R9.2 R11.2 R13.2 R19.1 R20.1 SWD.3 U1.1 UART.4 | length 204.3
  Top Layer w0.2: R13.2 R13.2@6.25,22.75 ; C3.1 v1(16,26.875) 16,27.75 ; C7.1 22,23.25 D1.8 v1(26.25,23.25) ; R5.2 25.25,6 C10.1 ; v1(25.25,26.5) 24.75,27 D1.47 24.703,28.247 24.703,30.547 C6.1 C5.1 26,32.5 R9.2 26.75,33.25 28.887,33.25 30.21,34.573 31.465,34.573 34.042,31.997 37.829,31.997 39.413,30.413 ; v1(28.75,21.5) 29.25,21 D1.23 29.25,17.5 C8.1 ; v1(29.75,25.75) 30.25,26.25 D1.35 ; v1(38.905,7.905) 39.25,8.25 42.5,8.25 R4.1 ; v1(39.413,31.587) 39.413,30.413 ; C1.1 42.153,28.097 41.729,28.097 39.413,30.413
  Top Layer w0.3: C10.1 26.75,6 v1(27,6.25)
  Top Layer w0.4: ENC.5 4.71,33.5 10.5,33.5 11.5,32.5 C9.1 v1(11.5,28.5) 13,27 ; R13.2@6.25,22.75 C4.1 ; C13.1 v1(11.5,9) C12.1 ; v1(12.5,1.75) R19.1 ; D3.2 13,27 ; C2.2 16,30.25 16,27.75 13.75,27.75 13,27 ; UART.4 20.71,37.79 23.25,35.25 ; U1.1 24.16,1.2 12IN.4 25.5,2.54 C11.1 C10.1 ; R5.2 23.5,11.105 22.772,11.833 22.772,15.172 23.944,16.344 26.271,16.344 26.771,15.844 28.229,15.844 28.906,16.521 28.906,17.25 C8.1 ; C5.1 24.5,34 23.25,35.25 ; R20.1 23.25,35.25 ; D2.4 v1(38.905,7.905) ; C1.1 R11.2 43.75,25.25 SWD.3
  Bottom Layer w0.2: v1(16,26.875) 17.875,26.875 21.75,23 23.5,23 23.75,23.25 25,23.25 ; v1(28.75,21.5) 26.5,21.5 26.25,21.75 v1(26.25,23.25) 25,23.25 ; v1(29.75,25.75) 29,26.5 v1(25.25,26.5) 24.25,25.5 24.25,24 25,23.25 ; GND.1@38.275,36.485 38.713,36.047 38.713,31.587
  Bottom Layer w0.3: v1(27,6.25) 37.25,6.25 v1(38.905,7.905)
  Bottom Layer w0.4: v1(7.5,21.5) 7.5,24.5 v1(11.5,28.5) ; v1(11.5,9) 12.5,8 v1(12.5,1.75) 12.75,1.5 12IN.4
  other v2: 7.5,7.5 17.5,7.5 10,12.5 15,12.5 20,12.5 25,12.5 7.5,17.5 42.5,17.5 10,22.5 40,22.5 12.5,27.5 22.5,27.5 37.5,27.5 5,32.5 10,32.5 15,32.5 20,32.5 30,32.5 7.5,37.5 12.5,37.5 22.5,37.5 27.5,37.5 32.5,37.5 42.5,37.5
Net12IN_2: 12IN.2 D2.7 R7.1 | length 11.8
  Top Layer w0.4: R7.1 28.3,5.95 28.75,5.5 30.1,5.5 ; 12IN.2 29.54,3.54 30.1,4.1 30.1,5.365 D2.7
Net12IN_3: 12IN.3 D2.1 R2.1 | length 25.6
  Top Layer w0.4: D2.1 v1(39.095,4.095) ; R2.1 38.75,10.5 v1(40,11.75)
  Bottom Layer w0.4: 12IN.3 28.137,1.5 28.137,2.903 37.903,2.903 v1(39.095,4.095) 40,5 v1(40,11.75)
NetC1_2: C1.2 D1.7 R10.1 SWD.5 | length 28.7
  Top Layer w0.2: D1.7 24,23.75 24.5,24.25 v1(25.5,24.25)
  Top Layer w0.4: v1(42,28.75) C1.2 R10.1 43.67,30.33 SWD.5
  Bottom Layer w0.2: v1(25.5,24.25) 25.847,23.903 26.521,23.903 28.174,22.25 35.5,22.25 v1(42,28.75)
NetC2_1: C2.1 D1.5 Z1.1 | length 9.6
  Top Layer w0.2: C2.1 C2.1@19,30.75 ; Z1.1 20.5,28 21.5,27 21.5,24.75 D1.5
  Top Layer w0.4: Z1.1 C2.1@19,30.75
NetC3_2: C3.2 D1.6 Z1.2 | length 6.7
  Top Layer w0.2: Z1.2@19.25,24 19.5,24.25 D1.6 D1.6@22.753,24.203
  Top Layer w0.4: C3.2 Z1.2
NetC4_2: C4.2 D3.1 R15.2 | length 14.8
  Top Layer w0.2: R15.2 9.822,25.75 11.447,24.126 ; C4.2 11.447,19.5 11.447,24.126 ; D3.1 13.95,25.2 13.053,24.303 11.624,24.303 11.447,24.126
NetC9_2: C9.2 D3.3 R18.2 | length 12
  Top Layer w0.4: R18.2 R18.2@5.945,27.25 ; C9.2 9.5,30.805 R18.2@5.945,27.25 ; D3.3 10.85,27.25 R18.2@5.945,27.25
NetD1_16: D1.16 D3.4 | length 17.7
  Top Layer w0.2: D3.4 12.05,21.95 15.5,18.5 25.354,18.5 25.703,18.85 25.703,19.753 D1.16
NetD1_17: D1.17 D3.6 | length 17.7
  Top Layer w0.2: D3.6 v1(18.15,19.25) ; v1(18.25,17.5) 25.75,17.5 25.75,18.25 26.25,18.75 D1.17
  Bottom Layer w0.2: v1(18.15,19.25) 18.15,17.6 v1(18.25,17.5)
NetD1_18: D1.18 R8.1 | length 11
  Top Layer w0.2: v1(26.75,17.75) D1.18
  Top Layer w0.4: R8.1 v1@32.25,12.5
  Bottom Layer w0.2: v1(26.75,17.75) 27.097,17.403 27.097,16.729 31.076,12.75 v1(32.25,12.75)
NetD1_19: D1.19 R3.1 | length 22.3
  Top Layer w0.2: D1.19 27.25,18.674 27.403,18.521 27.403,17.153 27.413,17.163 27.576,17 v1(27.75,17)
  Top Layer w0.4: R3.1 40.5,9.75 v1(41.5,10.75)
  Bottom Layer w0.2: v1(27.75,17) 31.347,13.403 32.521,13.403 33.174,12.75 41,12.75 41.5,12.25 v1(41.5,10.75)
NetD1_20: D1.20 R14.1 | length 28.2
  Top Layer w0.2: R14.1 10.153,16.847 26.479,16.847 26.979,16.347 28.021,16.347 28.403,16.729 28.403,17.271 28.021,17.653 27.966,17.653 27.806,17.812 27.806,18.688 27.75,18.744 D1.20
NetD1_25: D1.25 I01/IO2.1 | length 6.7
  Top Layer w0.2: D1.25 33.5,18.95 33.5,18 I01/IO2.1
NetD1_26: D1.26 I01/IO2.2 | length 5.3
  Top Layer w0.2: D1.26 32.29,21.75 I01/IO2.2
NetD1_27: D1.27 IO3/IO4.1 | length 8.5
  Top Layer w0.2: D1.27 32.256,22.25 32.312,22.194 33.188,22.194 33.244,22.25 34.79,22.25 IO3/IO4.1
NetD1_28: D1.28 IO3/IO4.2 | length 16.2
  Top Layer w0.2: D1.28 32.326,22.75 32.479,22.597 33.021,22.597 33.077,22.653 35.277,22.653 36.833,21.097 38.903,21.097 40.5,19.5 40.5,16.25 IO3/IO4.2
NetD1_30: D1.30 UART.2 | length 25.4
  Top Layer w0.2: D1.30 32.25,23.75 v1(32.75,23.25)
  Bottom Layer w0.2: UART.2 25.79,41.46 32.75,34.5 32.75,25.674 32.097,25.021 32.097,24.479 32.75,23.826 v1(32.75,23.25)
NetD1_31: D1.31 UART.1 | length 22.7
  Top Layer w0.2: D1.31 32.25,24.25 v1(32.75,24.75)
  Bottom Layer w0.2: UART.1 28.33,39.49 33.153,34.667 33.153,25.507 32.75,25.104 v1(32.75,24.75)
NetD1_34: D1.34 R12.1 SWD.4 | length 21.8
  Top Layer w0.2: D1.34 31.247,25.703 32.797,25.703 37,21.5 v1(42.5,21.5)
  Top Layer w0.4: v1(42.5,21.5) R12.1
  Bottom Layer w0.4: v1(42.5,21.5) 42.5,24.29 SWD.4
NetD1_37: D1.37 R11.1 SWD.2 | length 18.5
  Top Layer w0.2: D1.37 38.3,28.2 R11.1
  Top Layer w0.4: R11.1 43.79,22.71 SWD.2
NetD1_38: D1.38 VD2.1 | length 10.8
  Top Layer w0.2: D1.38 29.297,28.247 29.297,29.15 29.35,29.203 29.703,29.203 30.5,30 v1(30.5,30.5)
  Top Layer w0.4: VD2.1 v1(27.25,35.5)
  Bottom Layer w0.4: v1(27.25,35.5) 27.25,33.815 30.5,30.565 v1(30.5,30.5)
NetD1_42: D1.42 I2C.1 | length 24.6
  Top Layer w0.2: D1.42 27.297,28.247 27.297,29.15 27.646,29.5 28.62,29.5 29.5,30.38 v1(29.5,30.5)
  Bottom Layer w0.4: I2C.1 15.04,42.21 26.147,31.103 28.038,31.103 28.188,31.253 28.812,31.253 29.5,30.565 v1(29.5,30.5)
NetD1_43: D1.43 I2C.2 | length 25
  Top Layer w0.2: D1.43 26.797,28.247 26.797,29.221 27.479,29.903 28.453,29.903 28.5,29.95 v1(28.5,30.5)
  Bottom Layer w0.4: I2C.2 12.5,43.47 25.47,30.5 v1(28.5,30.5)
NetD1_44: D1.44 R9.1 | length 2.5
  Top Layer w0.2: D1.44 R9.1
NetD2_2: D2.2 R1.2 R4.2 | length 12.1
  Top Layer w0.4: R1.2@36.522,10.5 36.522,6.344 37.501,5.365 D2.2 41.865,5.365 42.5,6 R4.2
NetD2_3: D2.3 R3.2 | length 3.1
  Top Layer w0.4: D2.3 39.885,6.635 R3.2
NetD2_5: D2.5 R8.2 | length 1.6
  Top Layer w0.4: R8.2 32.3,9.45 D2.5
NetD2_6: D2.6 R5.1 R6.2 | length 10.1
  Top Layer w0.4: R5.1 27.25,7.75 27.5,8 v1@27.5,8.5 ; R6.2 30,9.3 v1(30,8.5) 30,7.5 30.865,6.635 D2.6
  Bottom Layer w0.4: v1(27.25,8.5) v1(30,8.5)
NetENC_2: ENC.2 R13.1 R14.2 | length 4.1
  Top Layer w0.4: ENC.2 3.42,22.42 R13.1 R14.2
NetENC_3: ENC.3 R15.1 R16.1 | length 4.3
  Top Layer w0.4: ENC.3 2.96,24.96 R15.1 R16.1
NetENC_4: ENC.4 R17.2 R18.1 | length 4.1
  Top Layer w0.4: ENC.4 3.5,27.5 R18.1 R17.2
NetR1_1: R1.1 R2.2 | length 1.9
  Top Layer w0.4: R1.1 R2.2
NetR6_1: R6.1 R7.2 | length 1.9
  Top Layer w0.4: R7.2 R6.1
NetR19_2: R19.2 VD1.2 | length 2
  Top Layer w0.4: R19.2 VD1.2
NetR20_2: R20.2 VD2.2 | length 2
  Top Layer w0.4: R20.2 VD2.2@26.5,38.5
pads on no net: D1. D1.2 D1.3 D1.4 D1.10 D1.11 D1.12 D1.13 D1.14 D1.15 D1.21 D1.22 D1.29 D1.32 D1.33 D1.39 D1.40 D1.41 D1.45 D1.46 D2.28 D3. U1. Z1.

## Polygon pours and split planes (outlines as drawn)
GND on Top Layer "Top Layer-No Net" (solid, remove dead copper, pour order 7): 0,10 0,35 10,45 37.5,45 47.5,35 47.5,10 37.5,0 10,0
GND on Bottom Layer "BottomLayer-No Net1" (solid, remove dead copper, pour order 8): 0,10 0,35 10,45 37.5,45 47.5,35 47.5,10 37.5,0 10,0

## Keep-outs
Keep-Out Layer:
  lines w0.1: 0,35 0,10 10,0 37.5,0 47.5,10 47.5,35 37.5,45 10,45 0,35 ; 0,35 0,35

## Silkscreen, mask and mechanical layers (free items; w line width, h text height)
Bottom Overlay:
  text "SDA" at 12.9,42.2 h1.52 r90
  text "SCL" at 15.5,42.2 h1.52 r90
  text "TX" at 28.8,42.2 h1.52 r90
  text "GND" at 21.2,42.1 h1.52 r90
  text "3V" at 23.8,42.1 h1.52 r90
  text "RX" at 26.3,42.1 h1.52 r90
  text "RES" at 42.1,30.725 h1.52 r180
  text "Gnd" at 2.6,30.6 h1.52 r180
  text "DIO" at 42.25,28.225 h1.52 r180
  text "Encoder B" at 2.6,28.1 h1.52 r180
  text "GND" at 41.625,25.7 h1.52 r180
  text "Encoder A" at 2.6,25.5 h1.52 r180
  text "CLK" at 41.925,23.125 h1.52 r180
  text "Button-" at 2.6,23 h1.52 r180
  text "3V" at 42.9,20.725 h1.52 r180
  text "Button+" at 2.6,20.2 h1.52 r180
  text "Сделано на Руси" at 0.8,12.8 h1.52 r180
  text "RFSW2089 V1.0" at 0.9,11.5 h1.52 r180
  text "Asdmicro 2020" at 0.9,10.3 h1.52 r180
  text "0-10V OUT2" at 27.5,10.3 h1.52 r90
  text "0-10V OUT1" at 30.2,10.1 h1.52 r90
  text "GND" at 25,5.5 h1.52 r90
  text "+12" at 32.5,4.7 h1.52 r90

## Dimensions
0,35 to 47.5,35 on Bottom Overlay
37.5,45.25 to 37.5,0 on Bottom Overlay